# Altium PCB PowerPCB1.PcbDoc
Units mm, origin at the board's own origin, x right, y up, seen from the top; angles counter-clockwise.
Board outline 57.53 x 42.8 mm, 2 copper layers (Top Layer, Bottom Layer); 20 components, 11 nets, 64 pads, 15 vias.
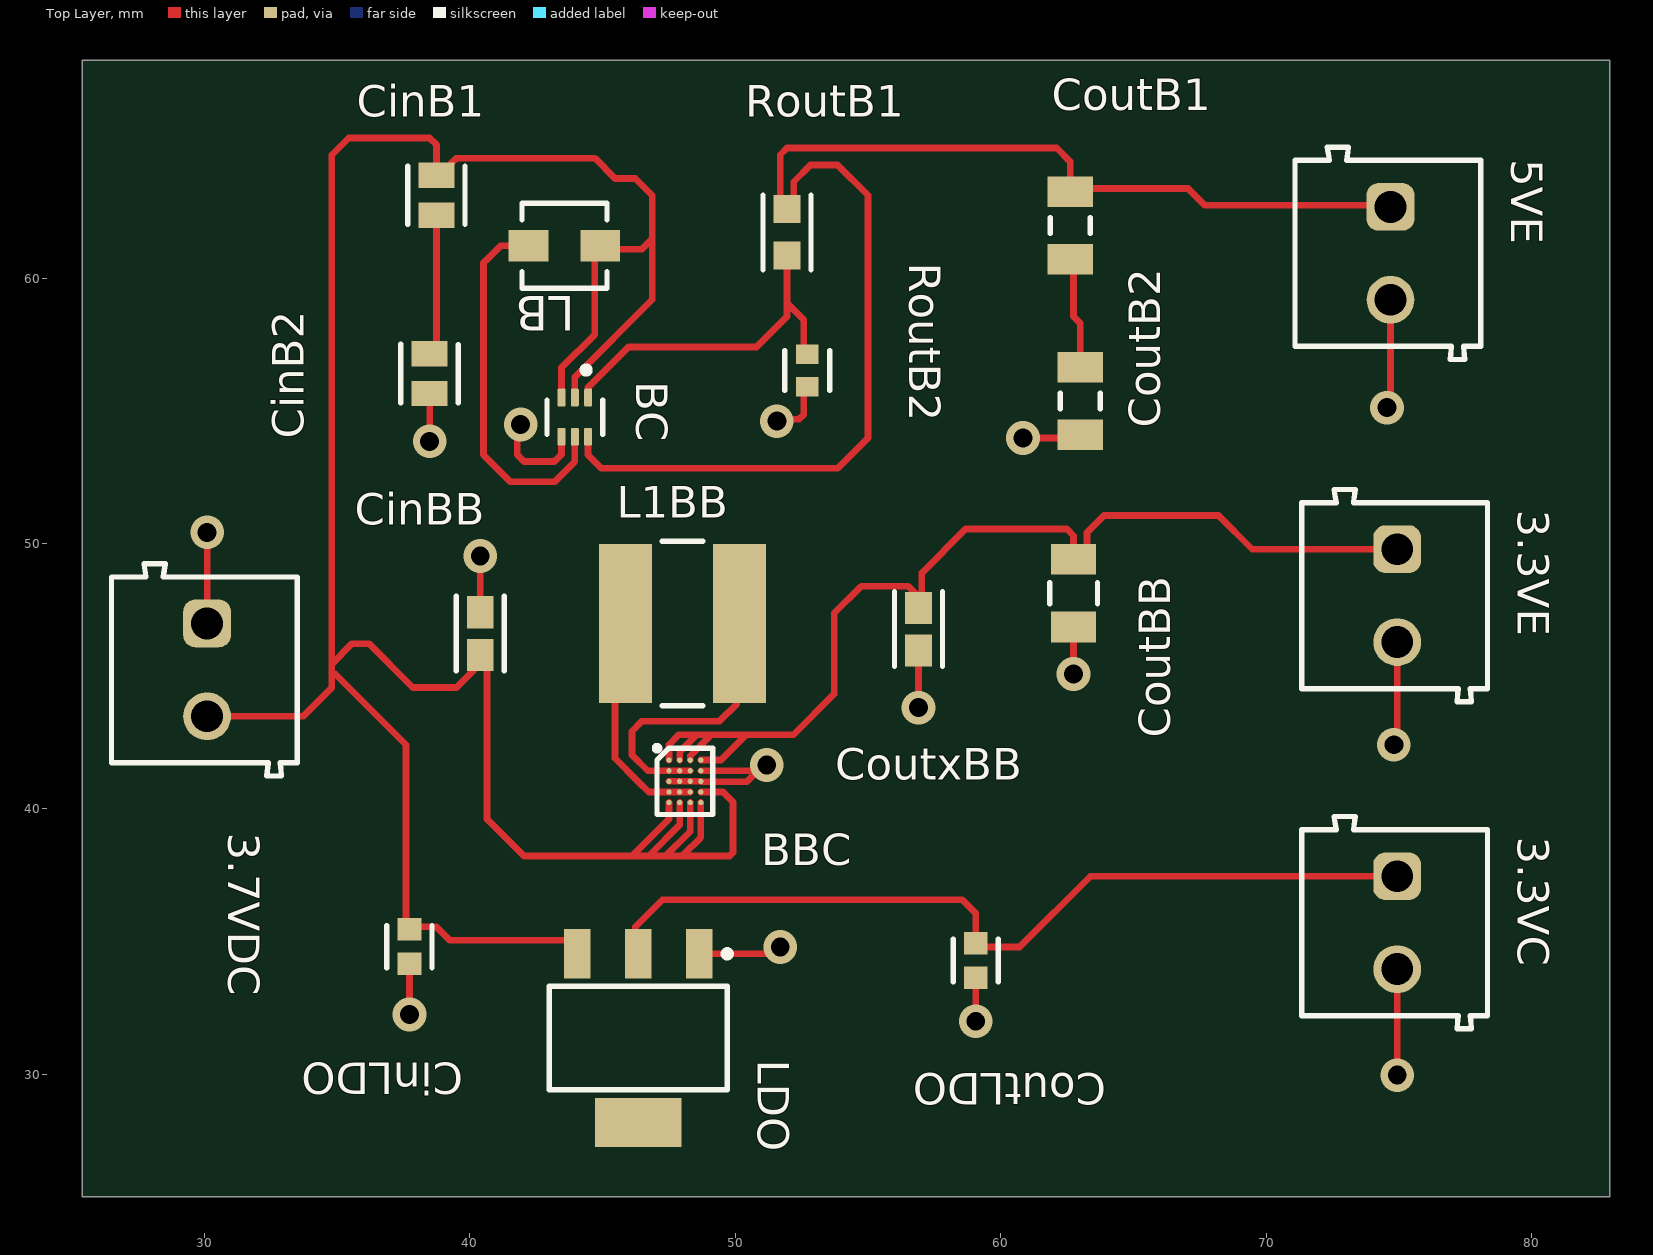
[diagram p0: Top Layer view]
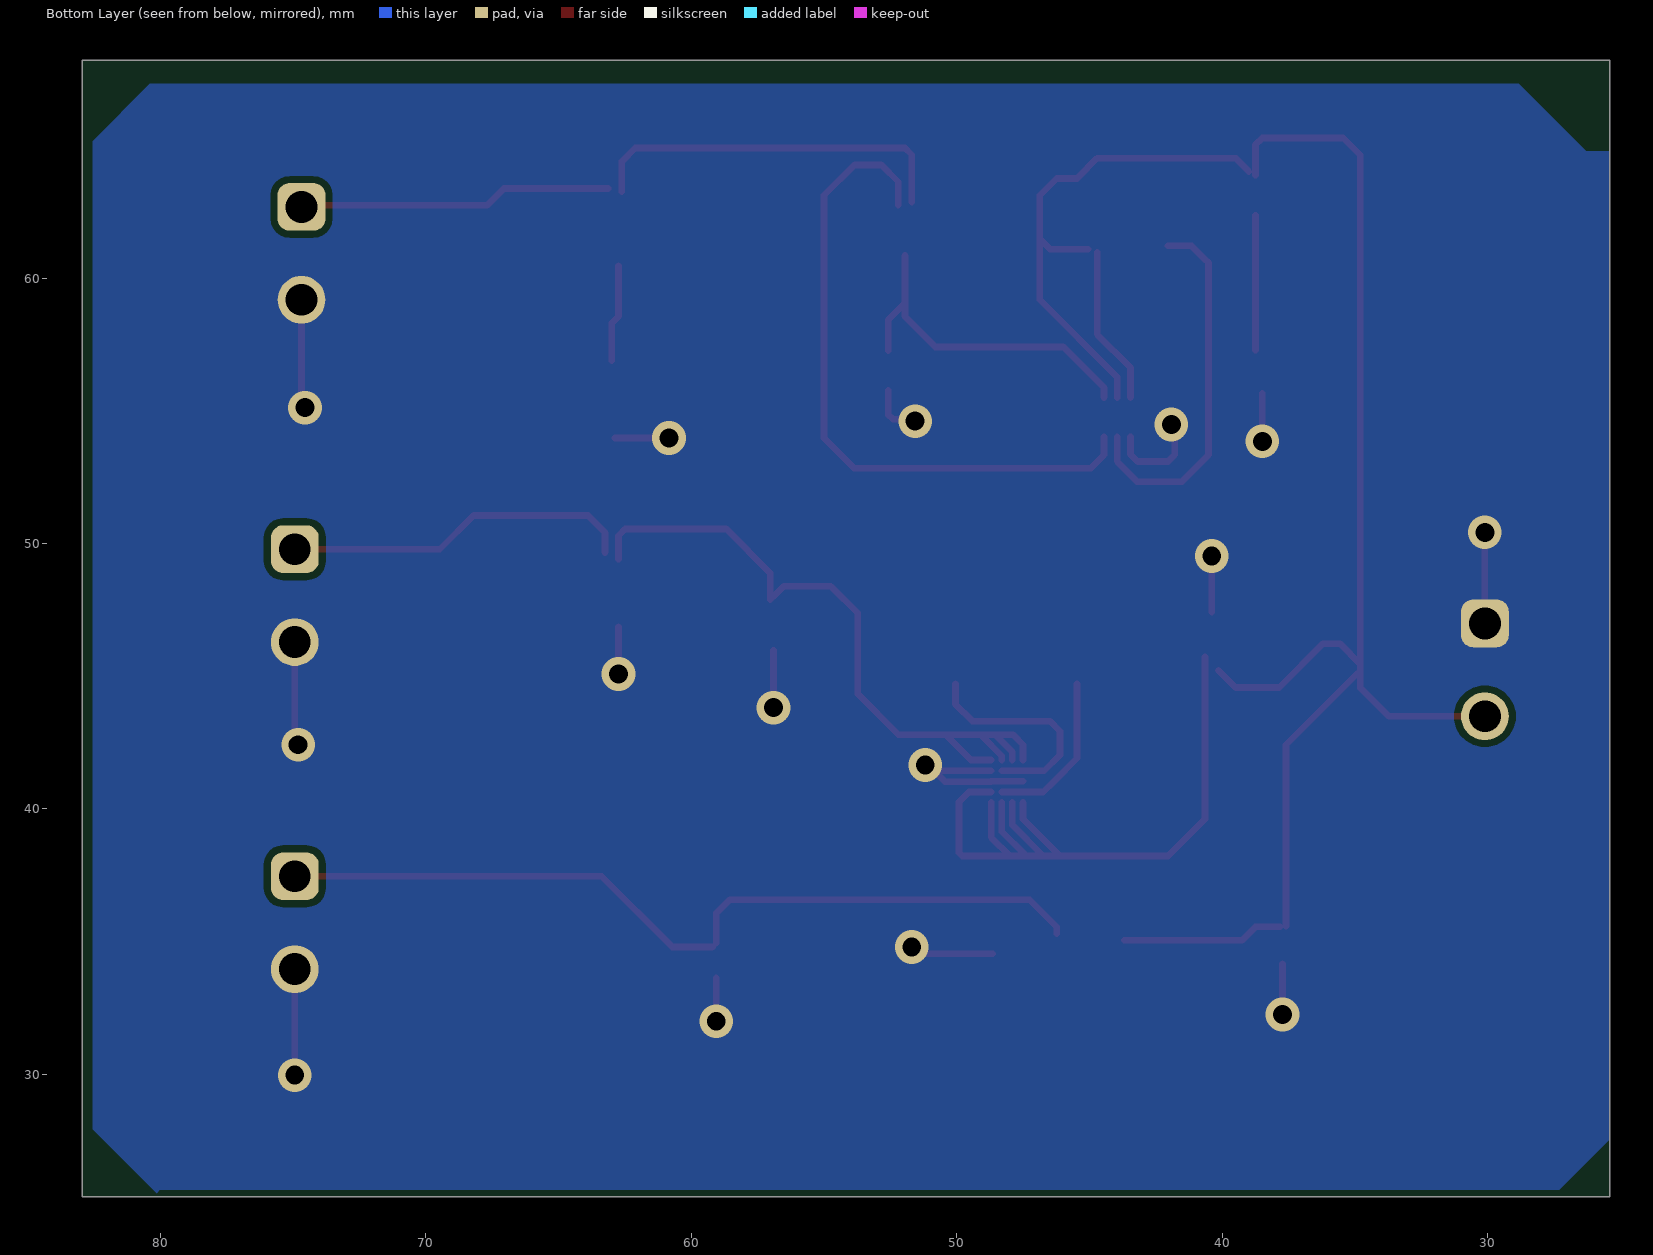
[diagram p1: Bottom Layer view, seen from below]

## Layer stack, top to bottom
Top Solder: solder mask 0.0102, Solder Resist, Dk 3.5
Top Layer: signal copper 0.0356
Dielectric 1: dielectric 0.32, FR-4, Dk 4.8
Bottom Layer: signal copper 0.0356
Bottom Solder: solder mask 0.0102, Solder Resist, Dk 3.5

## Board outline
25.4,25.4 82.931,25.4 82.931,68.199 25.4,68.199

## Design rules (kind name [scope] priority, off if disabled: settings)
Clearance [All] p1: gap=0.127 ignorepadtopadclearanceinfootprint=FALSE except(0: Arc-Hole Track-Hole SMDPad-Hole THPad-Hole Via-Hole Fill-Hole Poly-Hole Region-Hole Text-Hole)
PolygonConnect [All] p1: connectstyle=Direct reliefconductorwidth=0.254 reliefentries=4 polygonreliefangle="90 Angle" airgapwidth=0.254
RoutingVias [All] p1: holewidth=0.711 width=1.27 viastyle="Through Hole" minholewidth=0.711 minwidth=1.27 maxholewidth=0.711 maxwidth=1.27
SolderMaskExpansion [All] p1: expansion=0.102 istentingtop=FALSE
UnRoutedNet [All] p1: checkbadconnections=TRUE
Width [All] p1: maxlimit=0.254 minlimit=0.254 preferedwidth=0.254
29 further rules are at their usual default settings.

## Components (designator, comment, footprint, x,y, rotation, side; value= is the part's Value field where it differs from the comment)
3.3VC "691103110002" 691103110002 1344.83,-1234.285 r270 top
3.3VE "691103110002" 691103110002 1344.83,-1221.966 r270 top
3.7VDC "691103110002" 691103110002 1299.999,-1224.76 r270 top
5VE "691103110002" 691103110002 1344.576,-1209.068 r270 top
BBC "TPS630252YFFR" BGA20C40P4X5_177X209X62 48.098,41.04 r0 top
BC "TPS61023DRLR" FP-DRL0006A-MFG 43.95,54.759 r270 top
CinB1 "C0805C106K8PACTU" FP-C0805C-DG-MFG 38.735,63.119 r270 top value=10uF
CinB2 "C0805C106K8PACTU" FP-C0805C-DG-MFG 38.481,56.4 r270 top value=10uF
CinBB "GRM188R60J106ME47D" FP-GRM188-0_1-e0_2_0_55-IPC_A 40.386,46.609 r90 top
CinLDO "C0603X104K5RACTU" FP-C0603-CJ-MFG 37.719,34.813 r270 top value=100nF
CoutB1 "GRM31CR71C106KAC7L" CAPC3216X180X55LL20T25 62.611,61.976 r90 top
CoutB2 "GRM31CR71C106KAC7L" CAPC3216X180X55LL20T25 62.992,55.372 r90 top
CoutBB "GRM31CR60J476KE19L" FP-GRM31C-0_2-e0_3_0_8-IPC_C 62.738,48.133 r270 top
CoutLDO "C0603X104K5RACTU" FP-C0603-CJ-MFG 59.055,34.29 r270 top value=100nF
CoutxBB "GRM188R60J106ME47D" FP-GRM188-0_1-e0_2_0_55-IPC_A 56.896,46.776 r270 top
L1BB "SRN6045-1R0Y" FP-SRN6045-MFG 48.006,46.99 r0 top
LB "IHLP1212AEERR47M11" FP-IHLP-1212AE-11-MFG 43.561,61.214 r180 top
LDO "ADP3339AKCZ-5-R7" ADI-KC-3_N 46.341,31.369 r270 top
RoutB1 "RC0603FR-07732KL" FP-RC0603-0_55-IPC_A 51.943,61.722 r90 top
RoutB2 "CRCW0603100KFKEA" FP-CRCW0603-e3-IPC_C 52.705,56.515 r270 top

## Footprints (in the part's own frame and the unit in brackets; to place one, negate y for a bottom-side part, rotate by r counter-clockwise, add the part's x,y. Pads: shape width x height; smd on the part's side, far side on the other; paste and mask are expansions set on the pad)
691103110002 [mm] "3,50mm - modular - blue - Horizontal wire entry - Pressure clamp - 8,4mm height - 02p"
  rrect50% 1.8x1.8 hole 1.2: 1(-1271.75,-1269.9)
  round 1.8 hole 1.2: 2(-1268.25,-1269.9)
  silkscreen extent -1274,-1273.5 -1266,-1266.5, body extent -1274,-1273.5 -1266,-1266.5, height 8.45
ADI-KC-3_N [mm] "SOT223, 4-Leads, Body 6.5x3.5mm, Pitch 2.3mm, IPC Medium Density"
  rect 1.85x1 smd: 1(-3.175,2.3) 2(-3.175,0) 3(-3.175,-2.3)
  rect 1.85x3.25 smd: 4(3.175,0)
  silkscreen extent -3.3,-3.35 1.95,3.48, body extent -1.85,-3.35 1.85,3.35, height 1.8
BGA20C40P4X5_177X209X62 [mm]
  round 0.2 smd: A1(-0.6,0.8) A2(-0.2,0.8) A3(0.2,0.8) A4(0.6,0.8) B1(-0.6,0.4) B2(-0.2,0.4) B3(0.2,0.4) B4(0.6,0.4) C1(-0.6,0) C2(-0.2,0) C3(0.2,0) C4(0.6,0) D1(-0.6,-0.4) D2(-0.2,-0.4) D3(0.2,-0.4) D4(0.6,-0.4) E1(-0.6,-0.8) E2(-0.2,-0.8) E3(0.2,-0.8) E4(0.6,-0.8)
  silkscreen extent -1.15,-1.25 1.05,1.35
CAPC3216X180X55LL20T25 [mm] "Chip Capacitor, 2-Leads, Body 3.4x1.8mm, IPC High Density"
  rect 1.15x1.7 smd: 1(-1.275,0) 2(1.275,0)
  silkscreen extent -0.3,-0.75 0.3,0.75, body extent -1.7,-0.9 1.7,0.9, height 1.8
FP-C0603-CJ-MFG [mm]
  rect 0.85x0.9 smd paste+0 mask+0: 1(-0.65,0) 2(0.65,0)
  silkscreen extent -0.8,-0.85 0.8,0.85, body extent -1.2,-0.6 1.2,0.6, height 0.25
FP-C0805C-DG-MFG [mm]
  rect 0.95x1.35 smd paste+0 mask+0: 1(-0.75,0) 2(0.75,0)
  silkscreen extent -1.11,-1.08 1.1,1.07, body extent -1.4,-0.85 1.4,0.85, height 0.25
FP-CRCW0603-e3-IPC_C [mm]
  rect 0.735x0.862 smd paste+0 mask+0: 1(-0.615,0) 2(0.615,0)
  silkscreen extent -0.75,-0.85 0.75,0.85, body extent -1.08,-0.58 1.08,0.58, height 0.25
FP-DRL0006A-MFG [mm]
  rrect33% 0.67x0.3 smd paste+0 mask+0: 1(-0.74,0.5) 2(-0.74,0) 3(-0.74,-0.5) 4(0.74,-0.5) 5(0.74,0) 6(0.74,0.5)
  silkscreen extent -1.9,-1.05 0.65,1.05, body extent -1.17,-1.1 1.17,1.1, height 0.25
FP-GRM31C-0_2-e0_3_0_8-IPC_C [mm]
  rect 1.155x1.706 smd paste+0 mask+0: 1(-1.276,0) 2(1.276,0)
  silkscreen extent -0.4,-0.9 0.4,0.9, body extent -1.95,-1 1.95,1, height 0.25
FP-GRM188-0_1-e0_2_0_55-IPC_A [mm]
  rect 1.208x1.012 smd paste+0 mask+0: 1(-0.802,0) 2(0.802,0)
  silkscreen extent -1.41,-0.91 1.41,0.91, body extent -1.91,-1.01 1.91,1.01, height 0.25
FP-IHLP-1212AE-11-MFG [mm]
  rect 1.5x1.2 smd paste+0 mask+0: 1(-1.35,0) 2(1.35,0)
  silkscreen extent -1.6,-1.6 1.6,1.6, body extent -2.2,-1.7 2.2,1.7, height 0.25
FP-RC0603-0_55-IPC_A [mm]
  rect 1.059x1.012 smd paste+0 mask+0: 1(-0.877,0) 2(0.877,0)
  silkscreen extent -1.41,-0.91 1.41,0.91, body extent -1.91,-1.01 1.91,1.01, height 0.25
FP-SRN6045-MFG [mm]
  rect 2x6 smd paste+0 mask+0: 1(-2.15,0) 2(2.15,0)
  silkscreen extent -0.77,-3.1 0.77,3.1, body extent -3.25,-3.2 3.25,3.2, height 0.25

## Part data
3.3VC 3.3VE 3.7VDC 5VE: library part CMP-1502-03254-2, Color=Blue, Current=10A, Max Operating Temperature=105°C, Min Operating Temperature=-40°C, Voltage=125V, Contact Material="Brass, Copper, Nickel, Tin, Zinc", Contact Plating=Tin, Current Rating=10A, Height=8.5mm, Housing Material=Nylon, Lead Pitch=3.5mm, Length=7mm, Mount="Through Hole", NexarPartId=18818286, Number of Contacts=2, Number of Levels=1, Number of Pins=2, Number of Positions Per Level=2, Number of Rows=1, Packaging=Box, Pitch=3.5052mm, Plating=Steel, REACH SVHC=Unknown, RoHS=Compliant, Stripping Length=-6mm, Termination=Screw, Voltage Rating=125V, Width=8mm, Wire Gauge (Max)=26AWG, Wire Gauge (Min)=16AWG, Wire/Cable Gauge=26AWG
BBC: "4A switch Single-Inductor Buck-Boost Converter in WCSP", Manufacturer_Name="Texas Instruments", Mouser Part Number=595-TPS630252YFFR, Datasheet Link=http://www.ti.com/lit/gpn/tps630252, Geometry.Height=0.625mm, Manufacturer_Part_Number=TPS630252YFFR, Mouser Price/Stock=https://www.mouser.co.uk/ProductDetail/Texas-Instruments/TPS630252YFFR?qs=p08Uhw9w2FwDRg5liAczlw%3D%3D
BC: library part CMP-04918-000638-1, "FINISH GOODS FOR TPS61023"
CinB1 CinB2: library part CMP-2007-03243-2, "CAP CER 10UF 10V X5R 0805", 3DS Part Number=220-00001, Capacitance=10uF, Manufacturer=Kemet, Package=C0805C-DG, Temperature="-55°C to +85°C", Temperature Characteristic=X5R, Temperature Coefficient=15%, Temperature Range High=+85°C, Temperature Range Low=-55°C, Tolerance=10%, Voltage=10V, Automotive=No, Category=Cap, ComponentLink2Description=Datasheet, ComponentLink2URL=https://content.kemet.com/datasheets/KEM_C1006_X5R_SMD.pdf, Device Class L1="Passive Components", Device Class L2=Capacitors, Device Class L3="Ceramic Capacitors", Digikey Description="CAP CER 10UF 10V X5R 0805", Height=1.4mm, Ipc Land Pattern Name=CAPC200125X125, Lead Free=Yes, Manufacturer Part Number=C0805C106K8PACTU, Material=Ceramic, Mouser Description="CAP CER 10UF 10V X5R 0805", Octopart=https://octopart.com/c0805c106k8pactu-kemet-98697, RoHS=TRUE, Voltage Rating=10V
CinBB CoutxBB: library part CMP-2006-02792-2, "Chip Multilayer Ceramic Capacitors for General Purpose, 0603, 10uF, X5R, 15%, 20%, 6.3V", Capacitance=10uF, Case Code (Imperial)=0603, Case Code (Metric)=1608, Dielectric=X5R, Max Operating Temperature=85°C, Min Operating Temperature=-55°C, Package Quantity=4000, Tolerance=20%, Voltage=6.3V, Case/Package=0603, Depth=0.8mm, Height=0.8mm, Lead Free="Lead Free", Length=1.6mm, Material=Ceramic, Mount="Surface Mount", Packaging="Tape and Reel", Radiation Hardening=No, REACH SVHC="No SVHC", Termination=SMD/SMT, Thickness=0.035inch, Voltage Rating=6.3V, Voltage Rating (DC)=6.3V, Width=0.031inch
CinLDO CoutLDO: library part CMP-2006-03300-2, "CAP CER 0.1UF 50V X7R 0603", Capacitance=100nF, Manufacturer=Kemet, Package=C0603-CJ, Temperature="-55°C to +125°C", Temperature Characteristic=X7R, Temperature Coefficient=15%, Temperature Range High=+125°C, Temperature Range Low=-55°C, Tolerance=10%, Voltage=50V, Automotive=No, Category=Cap, ComponentLink2Description=Datasheet, ComponentLink2URL=https://content.kemet.com/datasheets/KEM_C1013_X7R_FT-CAP_SMD.pdf, Device Class L1="Passive Components", Device Class L2=Capacitors, Device Class L3="Ceramic Capacitors", Digikey Description="CAP CER 0.1UF 50V X7R 0603", Height=0.95mm, Ipc Land Pattern Name=CAPC16080X80, Lead Free=Yes, Manufacturer Part Number=C0603X104K5RACTU, Material=Ceramic, Mouser Description="Capacitor; Ceramic; Cap 0.1uF; Tol+10%; SMT; Flexible Termination; Vol-Rtg 50V; TR", Octopart=https://octopart.com/c0603x104k5ractu-kemet-9145062, RoHS=TRUE, Voltage Rating=50V
CoutB1 CoutB2: library part CMP-2000-06352-1, "Chip Capacitor, 10 uF, +/- 10%, 16 V, -55 to 125 degC, 1206 (3216 Metric), RoHS, Tape and Reel", Capacitance=10µF, Manufacturer=Murata, Operating Temperature=-55°C~125°C, Package / Case=1206(3216Metric), Package Description="2-Pin Surface Mount Device, Body 3.2 x 1.6 mm", Package Reference=1206, Ratings=-, Standard Package=1, Temperature Coefficient=X7R, Tolerance=±10%, Voltage - Rated=16V, Applications=GeneralPurpose, Catalog Drawings=GRMSeries_1206_1.6, Category=Capacitors, Datasheet URL=http://search.murata.co.jp/Ceramy/image/img/A01X/G101/ENG/GRM31CR71C106KAC7-01.pdf, Datasheet Version=03/2016, Family=CeramicCapacitors, Featured Product=GA3SafetyRecognizedCapsandHi-CapMLCC, Features=-, Height - Seated (Max)=-, Lead Spacing=-, Lead Style=-, Manufacturer URL=http://www.murata.com/, Mounting Technology=SurfaceMount, Mounting Type=SurfaceMount,MLCC, Online Catalog=GRMSeries, Other Names=490-3911-6, Packaging=Digi-Reel®, Product Training Modules=High-CapMultilayerCeramicCapacitors, Series=GRM, Size / Dimension="0.126\"Lx0.063\"W(3.20mmx1.60mm)", Thickness (Max)="0.071\"(1.80mm)"
CoutBB: library part CMP-06035-015040-1, "Chip Multilayer Ceramic Capacitors for General Purpose, 1206, 47uF, X5R, 15%, 10%, 6.3V", Capacitance=47uF, Case Code (Imperial)=1206, Case Code (Metric)=3216, Dielectric=X5R, Max Operating Temperature=85°C, Min Operating Temperature=-55°C, Package Quantity=1, Tolerance=10%, Voltage=6.3V, Case/Package=1206, Depth=1.6mm, Height=1.6mm, Lead Free="Lead Free", Length=3.2mm, Material=Ceramic, Mount="Surface Mount", Packaging="Tape and Reel", Radiation Hardening=No, REACH SVHC="No SVHC", Termination=SMD/SMT, Thickness=0.071inch, Voltage Rating=6.3V, Voltage Rating (DC)=6.3V, Width=1.6mm
L1BB: library part CMP-07248-000038-1, "FIXED IND 1UH 4.2A 13.9 MOHM SMD", Case/Package=Nonstandard, Current Rating=4.2A, DC Resistance (DCR)=13.9mR, Inductance=1uH, Inductance Tolerance=30%, Max Operating Temperature=125°C, Min Operating Temperature=-40°C, Package Quantity=1000, Saturation Current=8.5A, Self Resonant Frequency=50MHz, Test Frequency=100kHz, Composition=Wirewound, Core Material=Ferrite, DC Current=4.2A, Depth=6.2mm, Height=4.5mm, Height - Seated (Max)=0.177inch, Length=6mm, Material=Steel, Max DC Current=4.2A, Military Standard=Not, Mount="Surface Mount", Number of Pins=2, Packaging="Tape and Reel", REACH SVHC="No SVHC", RMS Current (Irms)=4.2A, Shielding=Shielded, Termination=SMD/SMT, Tolerance=30%, Width=6mm
LB: library part CMP-02424-000856-1, "FIXED IND 470NH 6.7A 15 MOHM SMD", Case Code (Imperial)=1212, Case/Package=Nonstandard, Current Rating=6.7A, DC Resistance (DCR)=15mR, Inductance=470nH, Inductance Tolerance=20%, Max Operating Temperature=125°C, Min Operating Temperature=-55°C, Package Quantity=3000, Self Resonant Frequency=1MHz, Test Frequency=100kHz, Core Material=Ferrite, Depth=3.2mm, Height=1.2mm, Height - Seated (Max)=0.059inch, Lead Free="Lead Free", Length=0.144inch, Max DC Current=6.7A, Military Standard=Not, Mount="Surface Mount", Number of Pins=2, Packaging="Cut Tape", Radiation Hardening=No, Rated Current-Max=6.7A, RMS Current (Irms)=6.7A, RoHS Compliant=Yes, Saturation Current=6.7A, Series=IHLP-1212AE-11, Shielding=Shielded, Termination=SMD/SMT, Tolerance=20%, Width=0.118inch
LDO: library part CMP-0786-00154-1, "High Accuracy, Ultralow IQ, 1.5 A, anyCAP Low Dropout Regulator, 2.8 to 6 V Vin, 5 V Vout, Industrial, 3-pin SOT223 (KC-3), Reel", Manufacturer="Analog Devices", Preset Vout Values (V)=5.0, Supply Current IGND @ Small Load=130uA, Code_JEDEC=TO-261-AA, ComponentLink1Description="Manufacturer URL", ComponentLink1URL=http://www.analog.com/en/index.html, ComponentLink2Description=Datasheet, ComponentLink2URL=http://www.analog.com/static/imported-files/data_sheets/ADP3339.pdf, ComponentLink3Description="Package Specification", ComponentLink3URL=http:/www.analog.com/static/imported-files/packages/PKG_PDF/SOT_223(KC)/KC_3.pdf, ComponentLink4Description="URL Link1", ComponentLink4URL="Product URL:http://www.analog.com/en/ADP3339/productSearch.html", DatasheetVersion="Rev. C", Iout max=1.5A, Mounting Technology="Surface Mount", PackageDescription="3-Pin Small Outline Transistor Package, Body 3.5 x 6.5 mm, Pitch 2.3 mm", PackageReference=KC-3, PackageVersion="11-20-2012-B, 11/2012", Packing=Reel, PartNumber=ADP3339AKCZ-5-R7, Vin (max) (V)=6, Vin (min) (V)=2.8
RoutB1: library part CMP-2000-04127-2, "RES SMD 732K OHM 1% 1/10W 0603", Case Code (Imperial)=0603, Case Code (Metric)=1608, Max Operating Temperature=155°C, Max Power Dissipation=100mW, Min Operating Temperature=-55°C, Resistance=732kR, Resistor Type="Thick Film", Temperature Coefficient=100ppm/°C, Tolerance=1%, Voltage Rating=50V, Case/Package=0603, Construction=Rectangular, Depth=0.8mm, Features="Moisture Resistant", Height=0.45mm, Lead Free="Lead Free", Length=1.6mm, Military Standard=Not, Number of Terminations=2, Packaging="Tape and Reel", Power Rating=100mW, RoHS Compliant=Yes, Series=RC, Size Code=0603, Termination=SMD/SMT, Voltage Rating (DC)=50V, Width=0.8mm
RoutB2: library part CMP-2000-03820-2, "RES Thick Film, 100kΩ, 1%, 0.1W, 100ppm/°C, 0603", Case Code (Imperial)=0603, Case Code (Metric)=1608, Max Operating Temperature=155°C, Max Power Dissipation=100mW, Min Operating Temperature=-55°C, Package Quantity=10, Resistance=100kR, Temperature Coefficient=100ppm/°C, Tolerance=1%, Voltage Rating=75V, Case/Package=0603, Composition="Thick Film", Contact Plating=Tin, Depth=0.85mm, Features="Automotive AEC-Q200", Height=0.45mm, Lead Free="Lead Free", Length=1.55mm, Military Standard=Not, Number of Pins=2, Number of Terminations=2, Packaging="Tape and Reel", Power Rating=100mW, Radiation Hardening=No, Termination=SMD/SMT, Voltage Rating (DC)=75V, Weight=7.1E-05oz, Width=0.033inch

## Via types
v1: diameter 1.27, hole 0.711, Top Layer to Bottom Layer, 15 vias

## Nets (pads, with @x,y where several pads share a name; then routed paths per layer and width w, separated by ;. In a path a pad name is that pad's centre, name@x,y a point inside that pad or via, vN(x,y) a via of type N, cw(c..) or ccw(c..) an arc to the next point about the centre after c; other vN are vias at no path point)
GND: 3.3VC.2 3.3VE.2 3.7VDC.1 5VE.2 BBC.B4 BBC.C1 BBC.C2 BBC.C3 BBC.C4 BC.4 CinB2.2 CinBB.2 CinLDO.2 CoutB2.1 CoutBB.2 CoutLDO.2 CoutxBB.2 LDO.1 RoutB2.2 | length 41.6
  Top Layer w0.254: 3.7VDC.1@29.718,47.117 30.099,47.498 v1(30.099,50.419) ; v1@37.719,32.385 CinLDO.2 ; v1(38.481,53.848) CinB2.2 ; CinBB.2 v1(40.386,49.53) ; v1@41.783,54.102 41.783,53.34 42.037,53.086 43.18,53.086 43.45,53.356 BC.4 ; BBC.C1 BBC.C2 BBC.C4 48.717,41.021 50.419,41.021 50.927,41.529 50.838,41.44 BBC.B4 ; LDO.1 v1@51.435,34.544 ; v1(51.562,54.61) v1@51.562,54.757 ; v1@51.562,54.683 52.397,54.683 52.578,54.864 RoutB2.2@52.578,55.773 ; v1(56.896,43.815) CoutxBB.2 ; v1(59.055,32.004) CoutLDO.2 ; v1(60.833,53.975) CoutB2.1@62.87,53.975 ; v1(62.738,45.085) CoutBB.2 ; v1@74.676,55.245 5VE.2 ; v1@74.93,30.353 3.3VC.2@74.93,33.655 ; v1@74.93,42.799 3.3VE.2
  other v1: 74.93,29.972 37.719,32.258 51.689,34.798 51.181,41.656 74.803,42.418 41.91,54.483 74.549,55.118
Net3.3VC_1: 3.3VC.1 CoutLDO.1 LDO.2 | length 31.7
  Top Layer w0.254: LDO.2@46.228,35.306 46.228,35.56 47.244,36.576 58.547,36.576 59.055,36.068 CoutLDO.1 ; CoutLDO.1@59.197,34.798 60.706,34.798 63.373,37.465 3.3VC.1
Net3.3VE_1: 3.3VE.1 BBC.A1 BBC.A2 BBC.A3 BBC.A4 CoutBB.1 CoutxBB.1 | length 40.5
  Top Layer w0.254: BBC.A1 47.498,42.418 47.879,42.799 52.197,42.799 53.721,44.323 53.721,47.371 54.737,48.387 56.515,48.387 CoutxBB.1@56.896,48.006 ; BBC.A2 47.898,42.145 48.514,42.761 ; BBC.A3 48.298,41.999 49.022,42.723 ; BBC.A4 49.46,41.84 50.419,42.799 ; CoutxBB.1@57.023,47.879 57.023,48.895 58.674,50.546 62.484,50.546 62.738,50.292 CoutBB.1 ; CoutBB.1@63.246,49.657 63.246,50.419 63.881,51.054 68.199,51.054 69.469,49.784 3.3VE.1
Net3.7VDC_2: 3.7VDC.2 BBC.D4 BBC.E1 BBC.E2 BBC.E3 BBC.E4 BC.2 BC.3 CinB1.1 CinBB.1 CinLDO.1 LB.1 LDO.3 | length 108.7
  Top Layer w0.254: 3.7VDC.2 33.711,43.49 34.798,44.577 34.798,64.643 35.433,65.278 38.227,65.278 38.481,65.278 38.735,65.024 CinB1.1 ; 34.798,45.085 34.925,45.085 37.592,42.418 CinLDO.1@37.592,35.59 ; 34.798,45.339 34.798,45.466 35.56,46.228 36.195,46.228 37.846,44.577 39.497,44.577 CinBB.1@40.132,45.212 ; CinLDO.1@37.816,35.56 38.735,35.56 39.243,35.052 41.148,35.052 LDO.3@43.688,35.052 ; CinB1.1@38.989,64.008 39.497,64.516 44.704,64.516 45.466,63.754 46.228,63.754 46.863,63.119 46.863,61.468 ; CinBB.1@40.64,45.72 40.64,39.624 42.037,38.227 49.784,38.227 49.911,38.354 49.911,38.481 49.911,40.259 49.53,40.64 BBC.D4 ; BC.3 43.45,56.626 44.704,57.88 LB.1@44.704,60.96 ; BC.2 43.95,56.253 43.95,56.269 46.863,59.182 46.863,59.817 46.863,61.468 ; LB.1@45.038,61.087 46.482,61.087 46.863,61.468 ; 46.101,38.227 47.498,39.624 BBC.E1 ; 46.736,38.227 47.898,39.389 BBC.E2 ; 47.371,38.227 48.298,39.154 BBC.E3 ; 48.006,38.24 48.698,38.932 BBC.E4
Net5VE_1: 5VE.1 BC.6 CoutB1.2 RoutB1.2 | length 51.2
  Top Layer w0.254: BC.6 44.45,53.34 44.958,52.832 53.848,52.832 54.991,53.975 54.991,63.119 53.848,64.262 52.832,64.262 52.197,63.627 RoutB1.2@52.197,62.738 ; RoutB1.2@51.689,62.865 51.689,64.643 51.943,64.897 62.103,64.897 62.611,64.389 CoutB1.2 ; CoutB1.2@63.119,63.373 67.056,63.373 67.691,62.738 5VE.1@74.422,62.738
NetBBC_B1: BBC.B1 BBC.B2 BBC.B3 L1BB.2 | length 8.5
  Top Layer w0.254: BBC.B3 BBC.B2 46.698,41.44 46.101,42.037 46.101,42.926 46.482,43.307 49.403,43.307 50.038,43.942 L1BB.2@50.038,44.704
NetBBC_D1: BBC.D1 BBC.D2 BBC.D3 L1BB.1 | length 6.2
  Top Layer w0.254: L1BB.1@45.466,44.704 45.466,41.91 46.355,41.021 46.736,40.64 BBC.D2 BBC.D3
NetBC_1: BC.1 RoutB1.1 RoutB2.1 | length 13.3
  Top Layer w0.254: BC.1 44.45,55.88 45.974,57.404 50.8,57.404 51.943,58.547 51.943,59.055 ; RoutB1.1 51.943,59.055 ; RoutB2.1@52.578,57.257 52.578,58.42 51.943,59.055
NetBC_5: BC.5 LB.2 | length 14.1
  Top Layer w0.254: LB.2@42.037,61.214 41.148,61.214 40.64,60.706 40.513,60.579 40.513,53.34 41.529,52.324 43.18,52.324 43.95,53.094 BC.5
NetCinB1_2: CinB1.2 CinB2.1 | length 5.1
  Top Layer w0.254: CinB2.1@38.735,57.277 CinB1.2
NetCoutB1_1: CoutB1.1 CoutB2.2 | length 3.7
  Top Layer w0.254: CoutB1.1@62.738,60.452 62.738,58.547 62.992,58.293 CoutB2.2@62.992,56.896
pads on no net: LDO.4

## Polygon pours and split planes (outlines as drawn)
GND on Bottom Layer "GND_L02_P003" (solid, pour order 3): 25.4,64.77 26.289,64.77 28.829,67.31 80.391,67.31 82.55,65.151 82.55,27.94 80.137,25.527 80.01,25.654 27.305,25.654 25.4,27.559 25.4,64.643